# Altium PCB ControlBoard_v2.PcbDoc (part 2 of 2)
Units mm, origin at the board's own origin, x right, y up, seen from the top; angles counter-clockwise.
Board outline 155.45 x 113.03 mm, 2 copper layers (Top Layer, Bottom Layer); 127 components, 106 nets, 627 pads, 129 vias.
Unrouted connection lines stored in the file: 132.
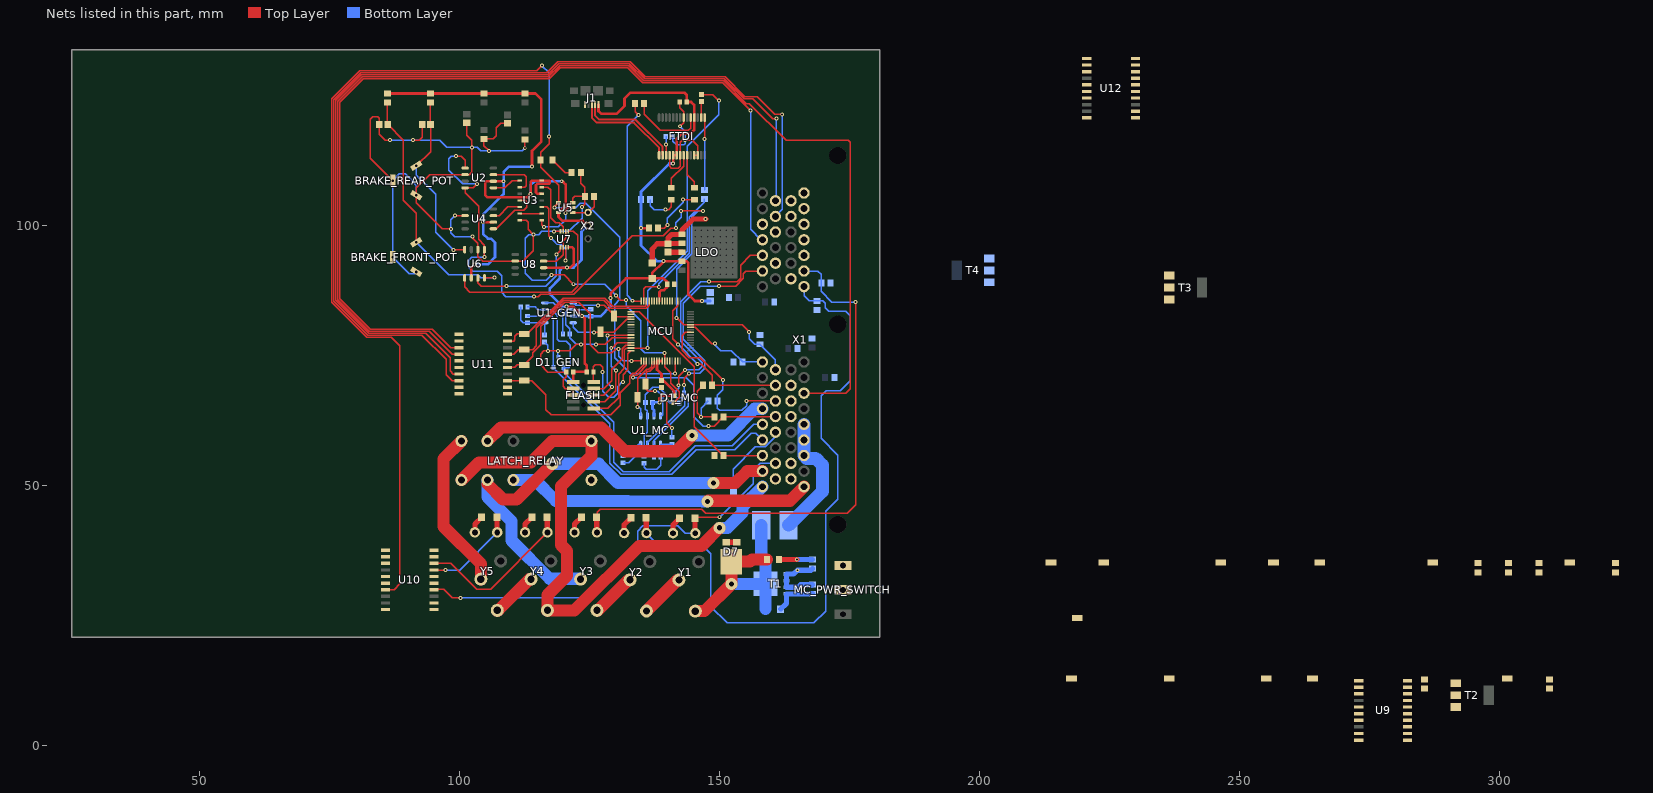
[diagram p2: the nets of this part, all layers, seen from the top]

## Via types
v1: diameter 0.762, hole 0.381, Top Layer to Bottom Layer, 123 vias
v2: diameter 2.34, hole 1, Top Layer to Bottom Layer, 6 vias

## Nets (pads, with @x,y where several pads share a name; then routed paths per layer and width w, separated by ;. In a path a pad name is that pad's centre, name@x,y a point inside that pad or via, vN(x,y) a via of type N, cw(c..) or ccw(c..) an arc to the next point about the centre after c; other vN are vias at no path point) (continued)
5V: C1_GEN.2 C1_MC.2 C4.2 C5.2 C6.2 C7.2 C8.2 C10.2 FLASH.1 FTDI.4 FTDI.19 FTDI.20 J1.1 LDO.4 LDO_D.1 MC_PWR_SWITCH.2 MCU.7 MCU.8 MCU.9 MCU.41 R4.2 R5.2 R6.2 R7.2 R25.2 R30.2 R35.2 R36.2 T3.2 T4.2 U1_GEN.3 U1_MC.3 U2.6 U3.12 U3.14 U4.6 U5.5 U6.6 U7.8 U8.6 U9.1 U9.10 U9.11 U9.12 U9.15 U9.16 U9.19 U9.20 X1.B18 X1.B19 X2.2 | length 308.2
  Top Layer w0.254: R4.2@104.521,125.335 R4.2@104.648,125.208 ; v1(119.634,108.458) v1@119.761,108.458 ; C6.2@138.811,70.317 C6.2@138.938,70.19 ; v1@139.192,92.944 v1(139.192,93.091) ; 141.734,116.6 141.746,116.6
  Top Layer w0.4: MCU.41@138.434,85.379 138.434,86.277
  Top Layer w0.513: R5.2@86.106,125.335 R6.2@94.361,125.335 R4.2@104.521,125.335 ; U6.6@102.235,89.858 102.235,91.831 v1(102.87,92.466) ; v1(104.521,100.584) U4.6@106.484,100.584 ; R4.2@104.648,125.335 R7.2@112.522,125.335 114.568,125.335 115.697,124.206 115.697,116.078 113.919,114.3 v1(113.919,111.252) ; v1(108.458,108.458) U2.6@106.484,108.458 105.156,108.458 104.902,108.204 104.902,105.791 105.283,105.41 113.099,105.41 v1(113.665,105.976) 113.665,108.331 113.919,108.585 U3.14@115.77,108.585 117.221,108.585 117.348,108.458 117.348,108.091 117.207,107.95 114.935,107.95 114.681,107.696 114.681,106.299 114.935,106.045 U3.12@115.77,106.045 ; U8.6@116.136,91.821 v1(120.65,91.821) 121.285,91.821 121.92,92.456 121.92,95.474 121.662,95.732 U7.8@121,95.732 ; v1@119.761,108.458 120.392,107.827 120.392,103.803 U5.5@119.017,102.428 119.017,101.582 119.761,100.838 123.637,100.838 X2.2@124.714,99.761 ; v1(120.523,84.328) 121.793,84.328 v1(123.571,82.55) 124.082,82.039 124.082,76.772 124.079,76.77 124.079,73.385 124.445,73.019 R30.2@124.445,71.795 ; C5.2@121.833,71.755 121.833,69.892 FLASH.1@121.875,69.85 ; C5.2@121.833,71.795 R30.2@124.445,71.795 ; R30.2@124.445,71.755 R30.2@124.445,71.795 ; J1.1@126.719,123.182 126.719,121.947 127.254,121.412 130.175,121.412 131.699,122.936 131.699,124.373 132.802,125.476 143.296,125.476 143.677,125.095 C10.2@143.677,123.698 144.526,123.698 145.114,123.11 FTDI.4@145.114,120.719 145.114,118.317 144.399,117.602 142.748,117.602 141.746,116.6 ; v1(129.032,85.979) 129.032,86.868 131.953,89.789 LDO_D.1@137.033,89.789 ; v1(134.874,99.441) 136.13,99.441 136.271,99.582 R35.2@136.412,99.441 ; v1(138.43,65.913) 138.43,66.686 138.967,67.223 C7.2@141.224,67.223 141.224,68.072 139.192,70.104 C6.2@139.065,70.104 ; 138.434,86.277 138.434,87.126 138.811,87.503 139.319,87.503 139.934,88.118 139.934,89.047 139.192,89.789 LDO_D.1@137.033,89.789 ; MCU.9@138.8,73.879 MCU.8@138.434,73.879 137.968,73.879 137.968,72.217 138.811,71.374 C6.2@138.811,70.317 ; v1@139.192,92.944 137.033,90.785 LDO_D.1@137.033,89.789 ; v1(139.192,93.091) 142.755,93.091 LDO.4@142.775,93.071 143.635,93.071 144,92.706 144,89.632 ; v1(141.058,111.887) FTDI.19@141.058,113.469 FTDI.20@141.734,113.469 141.734,116.6 ; 144,89.631 144,86.667 145.234,85.433 v1(146.596,85.433)
  Bottom Layer w0.254: U1_GEN.3@121.849,82.513 U1_GEN.3@121.889,82.473 ; X2.2@124.526,99.888 X2.2@125.222,99.888 ; U1_MC.3@137.368,63.304 U1_MC.3@137.442,63.378
  Bottom Layer w0.513: v1(102.87,92.466) 105.42,92.466 106.807,93.853 106.807,96.647 106.045,97.409 105.41,97.409 104.521,98.298 v1(104.521,100.584) 104.521,102.029 108.458,105.966 v1(108.458,108.458) 108.458,110.236 109.474,111.252 v1(113.919,111.252) ; v1(113.665,105.976) 113.665,107.696 114.427,108.458 v1(119.634,108.458) ; v1(120.523,84.328) 119.761,84.328 117.348,86.741 117.348,87.818 119.253,89.723 119.253,91.283 119.791,91.821 v1(120.65,91.821) 121.92,91.821 123.444,93.345 123.444,98.806 X2.2@124.526,99.888 ; U1_GEN.3@121.889,82.473 C1_GEN.2@125.22,82.473 127.05,82.473 129.032,84.455 v1(129.032,85.979) ; U1_MC.3@137.368,63.304 137.368,64.435 137.087,64.716 C1_MC.2@137.087,65.913 v1(138.43,65.913) ; v1(139.192,93.091) 137.922,93.091 134.874,96.139 v1(134.874,99.441) 134.888,99.455 R36.2@134.888,104.902 134.888,106.44 140.335,111.887 v1(141.058,111.887) ; v1(146.596,85.433) C4.2@148.187,85.433
6: MCU.27 R16.1 U2.1 U2.4 U6.1 X1.A17 | length 141.7
  Top Layer w0.254: v1(99.314,113.284) 100.272,113.284 101.034,112.522 U2.1@101.034,110.998 ; v1(103.378,107.95) 102.616,107.188 U2.4@101.034,107.188 101.034,106.23 103.632,103.632 103.632,97.282 104.775,96.139 U6.1@104.775,95.308 v1(104.775,93.853) ; v1(114.3,86.277) 115.106,86.277 115.57,86.741 121.92,86.741 133.162,97.983 139.119,97.983 140.591,99.455 v1(141.605,99.455) ; v1(141.734,82.169) 141.776,82.169 143.066,80.879 MCU.27@144.434,80.879 154.325,80.879 v1(155.702,79.502) ; v1(142.621,102.743) v1(146.826,102.743)
  Bottom Layer w0.254: v1(99.314,113.284) 98.425,113.284 97.917,112.776 97.917,110.617 100.584,107.95 v1(103.378,107.95) ; v1(104.775,93.853) 102.362,93.853 101.727,93.218 101.727,91.953 102.489,91.191 107.183,91.191 108.077,90.297 108.077,87.102 108.902,86.277 v1(114.3,86.277) ; v1(141.605,99.455) 141.605,100.469 142.621,101.485 v1(142.621,102.743) ; v1(141.734,82.169) 141.734,91.569 144.687,94.522 144.687,101.487 145.943,102.743 v1(146.826,102.743) ; v1(155.702,79.502) 155.702,78.18 156.779,77.103 R16.1@157.734,77.103 160.743,74.094 X1.A17@160.743,72.191
7: MCU.26 R23.1 X1.A9 | length 16.9
  Top Layer w0.254: MCU.26@144.434,80.379 145.3,80.379 148.463,77.216 v1(149.098,77.216)
  Bottom Layer w0.254: v1(149.098,77.216) 149.098,76.962 150.241,75.819 152.29,75.819 R23.1@154.418,73.691 X1.A9@158.243,73.691 X1.A9@158.243,73.899
8: MCU.34 R19.1 X1.A16 | length 32.3
  Top Layer w0.254: MCU.34@141.934,85.379 141.934,84.53 140.97,83.566 140.97,78.131 v1(142.012,77.089) ; v1(145.711,73.279) 146.431,73.279 148.576,71.134 R19.1@148.576,69.215 160.719,69.215 X1.A16@160.743,69.191
  Bottom Layer w0.254: v1(142.012,77.089) 145.711,73.39 v1(145.711,73.279)
9: MCU.24 R21.1 X1.A15 | length 33.4
  Top Layer w0.254: MCU.24@144.434,79.379 143.387,79.379 142.775,78.767 142.775,75.919 144.145,74.549 146.304,74.549 v1(150.622,70.231) ; v1(155.194,66.191) X1.A15@160.743,66.191
  Bottom Layer w0.254: v1(150.622,70.231) 150.622,68.326 149.592,67.296 R21.1@149.592,66.191 149.592,64.794 149.997,64.389 154.305,64.389 155.194,65.278 v1(155.194,66.191)
10: MCU.3 R24.1 X1.A14 | length 40.5
  Top Layer w0.254: v1(133.35,70.691) 133.104,70.691 133.578,71.165 134.081,71.165 134.543,71.628 135.934,73.019 MCU.3@135.934,73.879 ; v1(147.828,61.341) 148.957,61.341 R24.1@150.735,63.119 160.671,63.119 X1.A14@160.743,63.191
  Bottom Layer w0.254: v1(133.35,70.691) 143.558,70.691 145.034,69.215 145.034,63.119 146.812,61.341 v1(147.828,61.341)
12V_PWR: "PTC Fuse.1" X1.A28 X1.A29 X1.A30 X1.B22 | length 24.6
  Bottom Layer w2.5: 163.28,42.291 169.799,48.81 169.799,53.848 168.479,55.168 166.766,55.168 X1.A28@166.243,55.691 X1.A29@166.243,58.691 X1.A30@166.243,61.691
AGND: BRAKE_FRONT_POT.2 BRAKE_FRONT_POT.3 BRAKE_REAR_POT.2 BRAKE_REAR_POT.3 C7.1 C12.1 C13.1 C14.1 C15.1 MCU.10 R8.1 R9.1 R10.1 R11.1 R13.2 R14.1 R16.2 R17.1 R20.1 R22.1 R23.2 U2.2 U3.7 U4.2 U5.3 U6.2 U7.4 U8.2 X1.B23 X1.B24 | length 242
  Top Layer w0.254: v1(86.614,116.37) 85.687,116.37 84.544,117.513 C14.1@84.544,119.38 84.544,120.565 84.205,120.904 83.312,120.904 82.804,120.396 82.804,112.903 BRAKE_REAR_POT.2@87.122,108.585 ; v1(91.021,116.37) 92.202,116.37 92.799,116.967 C15.1@92.799,119.38 ; v1(98.298,99.314) 96.647,99.314 91.667,104.294 BRAKE_REAR_POT.3@91.667,105.745 91.667,107.161 94.234,109.728 U2.2@101.034,109.728 101.854,109.728 102.362,110.236 v1(102.362,114.966) 102.362,116.332 101.346,117.348 C13.1@101.346,119.723 ; v1(99.06,101.854) U4.2@101.034,101.854 ; v1(102.489,97.79) 102.489,97.536 103.505,96.52 U6.2@103.505,95.308 103.505,93.98 104.394,93.091 U8.2@110.686,93.091 112.141,93.091 114.173,95.123 v1(114.173,98.171) 113.157,99.187 113.157,100.584 112.776,100.965 U3.7@111.56,100.965 ; v1(105.664,114.3) 104.648,115.316 R9.1@104.648,116.6 106.426,116.6 107.061,117.235 107.061,118.773 107.884,119.596 C12.1@109.22,119.596 ; v1(112.522,114.808) R8.1@112.522,116.473 ; v1(117.679,90.424) 120.116,90.424 121.875,88.665 v1(121.875,88.646) ; v1(118.11,98.806) 119.366,98.806 U7.4@119.392,98.832 ; U5.3@121.767,104.328 121.767,105.156 122.148,105.537 R11.1@124.093,105.537 ; R10.1@123.303,110.109 123.303,108.091 124.093,107.301 R11.1@124.093,105.537 ; v1(123.571,103.505) 124.093,104.027 R11.1@124.093,105.537 ; v1(130.048,86.487) 130.937,85.598 v1(132.005,85.598) ; v1(139.446,75.438) 139.446,73.891 MCU.10@139.434,73.879 139.434,72.775 140.589,71.62 140.589,69.638 142.24,67.987 142.24,66.889 C7.1@141.224,65.873
  Bottom Layer w0.254: v1(86.614,116.37) v1(91.021,116.37) 96.132,116.37 97.536,114.966 v1(102.362,114.966) 103.347,114.966 104.013,114.3 v1(105.664,114.3) 112.014,114.3 v1(112.522,114.808) ; BRAKE_FRONT_POT.3@91.667,91.013 91.332,90.678 90.297,90.678 BRAKE_FRONT_POT.2@87.122,93.853 BRAKE_REAR_POT.2@87.122,108.585 88.392,109.855 89.535,109.855 91.667,107.723 BRAKE_REAR_POT.3@91.667,105.745 ; v1(99.06,101.854) 98.298,101.092 v1(98.298,99.314) 98.298,98.552 99.06,97.79 v1(102.489,97.79) ; v1(117.679,90.424) 116.663,89.408 113.98,89.408 112.588,90.8 112.588,97.475 113.284,98.171 v1(114.173,98.171) 115.189,98.171 115.824,98.806 v1(118.11,98.806) 121.031,98.806 123.571,101.346 v1(123.571,103.505) ; v1(121.875,88.646) 127.889,88.646 v1(130.048,86.487) ; v1(132.005,85.598) 132.005,84.53 134.874,81.661 134.874,76.2 135.636,75.438 v1(139.446,75.438)
AIR+_5V: MCU.39 TEST12.1 U12.5
AIR+_12V: U12.17 X1.B14
AIR-_5V: MCU.42 TEST13.1 U12.7
AIR-_12V: U12.14 X1.B11
ALL_GOOD: U3.8 U5.2 | length 9.7
  Top Layer w0.254: U3.8@115.77,100.965 115.77,100.13 v1(116.205,99.695) ; v1(120.396,102.362) 120.396,102.997 120.777,103.378 U5.2@121.767,103.378
  Bottom Layer w0.254: v1(116.205,99.695) 118.999,99.695 120.396,101.092 v1(120.396,102.362)
BF_ADJUST_OK: U6.7 U7.5 | length 22.9
  Top Layer w0.254: U6.7@103.505,89.858 103.505,88.9 104.14,88.265 v1(108.966,88.265) ; v1(118.618,94.361) 119.392,95.135 U7.5@119.392,95.732
  Bottom Layer w0.254: v1(108.966,88.265) 116.586,88.265 118.618,90.297 v1(118.618,94.361)
BMS_OK: D2.2 R15.1 TEST5.1 U9.5 X1.B20 Y2.COIL1 | length 127.2
  Top Layer w1: D2.2@135.884,43.688 135.884,40.83 Y2.COIL1@135.933,40.781
  Bottom Layer w0.254: Y2.COIL1@135.933,40.781 138.43,38.284 146.882,38.284 148.336,36.83 148.336,26.586 151.427,23.495 168.148,23.495 170.434,25.781 170.434,44.958 172.743,47.267 172.743,55.776 169.545,58.974 169.545,67.183 170.561,68.199 173.252,68.199 175.133,70.08 175.133,82.55 174.244,83.439 170.995,83.439 170.307,84.127 170.307,84.963 169.813,85.457 R15.1@168.783,85.457 167.259,85.457 166.243,86.473 X1.B20@166.243,88.191
BMS_OK_5V: MCU.12 U9.17
BR_ADJUST_OK: U6.5 U7.1 | length 36.2
  Top Layer w0.254: U6.5@100.965,89.858 100.965,88.138 101.981,87.122 109.102,87.122 109.106,87.126 118.224,87.126 118.228,87.122 121.539,87.122 122.682,88.265 122.682,98.044 121.894,98.832 U7.1@120.892,98.832
BRAKE_FRONT_POT: BRAKE_FRONT_POT.1 C14.2 R5.1 U6.8 | length 48.9
  Top Layer w0.254: R5.1@86.106,123.585 86.106,119.418 C14.2@86.144,119.38 89.154,116.37 89.154,104.775 91.667,102.262 BRAKE_FRONT_POT.1@91.667,96.693 ; U6.8@104.775,89.858 104.833,89.916 v1(106.68,89.916)
  Bottom Layer w0.254: BRAKE_FRONT_POT.1@91.667,96.693 97.936,90.424 103.505,90.424 104.013,89.916 v1(106.68,89.916)
BRAKE_LIGHT_5V: MCU.43 TEST11.1 U12.3
BRAKE_LIGHT_12V: U12.18 X1.A18
BRAKE_REAR_POT: BRAKE_REAR_POT.1 C15.2 R6.1 U6.4 | length 34.6
  Top Layer w0.254: BRAKE_REAR_POT.1@91.667,111.425 94.399,114.157 C15.2@94.399,119.38 94.361,119.418 R6.1@94.361,123.585 ; v1(98.806,95.25) 100.907,95.25 U6.4@100.965,95.308
  Bottom Layer w0.254: BRAKE_REAR_POT.1@91.667,111.425 91.667,109.628 95.377,105.918 95.377,98.679 v1(98.806,95.25)
BRK_RANGE_OK: U3.6 U3.9 | length 4.2
  Top Layer w0.254: U3.6@111.56,102.235 U3.9@115.77,102.235
BSPD_OK_5V: BSPD_OK.1 MCU.14 TEST10.1 U5.4 U10.7 | length 232.7
  Top Layer w0.254: U10.7@85.749,29.876 87.407,29.876 88.519,30.988 88.519,34.317 88.519,76.835 86.868,78.486 82.173,78.486 75.438,85.221 75.438,124.329 80.776,129.667 114.808,129.667 v1(115.824,130.683) ; v1(117.221,117.094) 117.221,115.697 115.563,114.039 BSPD_OK.1@115.563,112.522 115.563,111.132 119.017,107.678 U5.4@119.017,104.328 118.237,103.548 v1(118.237,103.378) ; v1(141.434,71.457) MCU.14@141.434,73.879
  Bottom Layer w0.254: v1(115.824,130.683) 117.221,129.286 v1(117.221,117.094) ; v1(118.237,103.378) 122.301,103.378 123.19,104.267 124.272,104.267 130.81,97.729 130.81,85.76 129.794,84.744 129.794,74.549 132.969,71.374 133.052,71.457 v1(141.434,71.457)
BSPD_OK_12V: D1.2 U10.14 X1.A11 Y1.COIL1 | length 83.7
  Top Layer w0.254: U10.14@95.099,29.972 96.901,29.972 98.552,28.321 v1(100.203,28.321) ; D1.2@145.282,43.663 145.444,43.825 v1(149.997,43.825)
  Top Layer w1: D1.2@145.282,43.663 145.282,40.805 Y1.COIL1@145.331,40.756
  Bottom Layer w0.254: v1(100.203,28.321) 125.222,28.321 134.239,37.338 134.239,41.148 135.255,42.164 141.986,42.164 143.394,40.756 Y1.COIL1@145.331,40.756 ; v1(149.997,43.825) 156.464,50.292 156.464,52.832 157.823,54.191 X1.A11@160.743,54.191
CAN_H_GEN: D1_GEN.1 R3_GEN.2 U1_GEN.7 X1.A5 | length 74.8
  Bottom Layer w0.254: R3_GEN.2@113.043,84.291 114.504,84.291 115.012,83.783 U1_GEN.7@116.399,83.783 117.679,83.783 118.743,82.719 118.743,78.092 119.196,77.639 120.521,77.639 121.283,76.877 121.283,72.94 120.966,72.623 D1_GEN.1@119.947,72.623 119.947,71.821 129.667,62.101 129.667,54.356 131.445,52.578 140.335,52.578 145.288,57.531 152.433,57.531 156.593,61.691 X1.A5@158.243,61.691
CAN_H_MC: D1_MC.1 R3_MC.2 U1_MC.7 X1.B3 | length 60.9
  Top Layer w0.254: v1(142.113,69.215) 142.113,70.921 v1(143.383,72.191) ; v1(147.955,89.154) 153.416,89.154 154.051,89.789 154.051,92.329 155.913,94.191 X1.B3@158.243,94.191
  Bottom Layer w0.254: R3_MC.2@135.497,55.514 136.098,56.115 U1_MC.7@136.098,57.854 136.098,58.12 143.256,65.278 143.256,66.421 142.875,66.802 141.732,66.802 141.278,67.256 D1_MC.1@141.278,67.802 142.113,68.637 v1(142.113,69.215) ; v1(143.383,72.191) 146.012,72.191 146.701,72.88 146.701,73.517 142.494,77.724 142.494,85.244 146.404,89.154 v1(147.955,89.154)
CAN_L_GEN: D1_GEN.2 R2_GEN.1 U1_GEN.6 X1.A4 | length 71.6
  Bottom Layer w0.254: R2_GEN.1@113.028,82.528 113.043,82.513 U1_GEN.6@116.399,82.513 117.679,82.513 118.047,82.145 D1_GEN.2@118.047,72.623 128.905,61.765 128.905,54.229 131.064,52.07 140.843,52.07 145.542,56.769 152.876,56.769 156.051,59.944 156.99,59.944 X1.A4@158.243,58.691
CAN_L_MC: D1_MC.2 R2_MC.1 U1_MC.6 X1.B2 | length 55.7
  Top Layer w0.254: v1(143.178,69.293) 143.178,70.534 v1(144.145,71.501) ; v1(149.86,88.265) 153.066,88.265 154.559,89.758 154.559,90.678 155.072,91.191 X1.B2@158.243,91.191
  Bottom Layer w0.254: R2_MC.1@137.387,55.372 137.387,57.835 U1_MC.6@137.368,57.854 137.368,58.501 144.018,65.151 144.018,66.962 D1_MC.2@143.178,67.802 v1(143.178,69.293) ; v1(144.145,71.501) 146.206,71.501 147.193,72.488 147.193,73.899 143.002,78.09 143.002,84.963 146.304,88.265 v1(149.86,88.265)
D_N: FTDI.16 J1.2 | length 19.2
  Top Layer w0.381: J1.2@126.069,123.182 126.069,121.073 126.784,120.358 133.769,120.358 133.985,120.142 139.03,115.097 FTDI.16@139.03,113.469
D_P: FTDI.15 J1.3 | length 19.2
  Top Layer w0.381: J1.3@125.419,123.182 125.419,120.707 126.403,119.723 133.506,119.723 138.362,114.867 138.362,114.492 138.354,114.484 FTDI.15@138.354,113.469
DCDC_DISABLE_5V: MCU.46 TEST17.1 U11.9 | length 32
  Top Layer w0.254: U11.9@109.196,77.719 110.363,77.719 110.617,77.973 110.617,78.608 111.125,79.116 TEST17.1@112.399,79.116 113.032,79.116 119.895,85.979 127.889,85.979 129.418,84.45 135.689,84.45 135.934,84.695 MCU.46@135.934,85.379
DCDC_DISABLE_12V: U11.13 X1.B4 | length 175.7
  Top Layer w0.254: U11.13@99.846,76.449 98.303,76.449 94.742,80.01 82.804,80.01 76.962,85.852 76.962,123.698 81.407,128.143 117.221,128.143 119.38,130.302 132.334,130.302 135.255,127.381 150.622,127.381 v1(155.956,122.047)
  Bottom Layer w0.254: v1(155.956,122.047) 155.956,99.187 157.952,97.191 X1.B4@158.243,97.191
DGND: C1_GEN.1 C1_MC.1 C2_GEN.1 C2_MC.1 C3.1 C4.1 C5.1 C6.1 C8.1 C10.1 C11.1 D1.1 D1_GEN.3 D1_MC.3 D2.1 D3.1 D4.1 D5.1 D7.1 D7.2 FLASH.3 FLASH.5 FTDI.7 FTDI.18 FTDI.21 FTDI.25 FTDI.26 J1.5 LATCH_RELAY.1 LDO.3 MCU.40 MCU.59 R1_GEN.1 R1_MC.1 R12.2 R15.2 R18.2 R19.2 R21.2 R24.2 R26.1 R27.1 R28.1 R29.1 R31.1 R32.1 R37.1 R38.1 T1.1 T1.2 T1.3 T2.3 U1_GEN.2 U1_MC.2 U9.2 U9.6 U10.2 U10.6 U11.2 U11.6 U12.2 U12.6 X1.A22 X1.A23 X1.A24 X1.B25 X1.B26 Y1.COIL2 Y2.COIL2 Y3.COIL2 Y4.COIL2 Y5.COIL2 | length 157.6
  Top Layer w0.254: FLASH.5@121.875,67.31 FLASH.3@121.875,68.58 120.356,68.58 119.892,69.044 119.892,70.235 120.483,70.826 C5.1@120.483,71.755 116.967,71.755 115.563,73.159 115.563,75.177 116.205,75.819 v1(116.967,75.819) v1(118.872,75.819) 121.158,75.819 122.428,77.089 v1(123.317,77.089) ; v1(126.238,77.089) 128.016,77.089 129.306,78.379 MCU.59@132.934,78.379 ; v1(139.827,66.421) 139.827,61.964 v1(140.831,60.96) ; FTDI.18@140.382,113.469 140.382,111.339 140.723,110.998 142.069,110.998 142.41,111.339 FTDI.21@142.41,113.469 142.41,115.927 142.853,116.37 v1(143.383,116.37) 144.695,116.37 145.79,115.275 FTDI.26@145.79,113.469 FTDI.25@145.114,113.469 ; C10.1@142.327,123.698 142.327,122.622 143.086,121.863 FTDI.7@143.086,120.719 143.086,119.756 v1(142.367,119.037) ; R19.2@146.826,69.215 145.669,68.058 145.669,63.881 v1(146.431,63.119) R24.2@148.985,63.119
  Top Layer w1: Y5.COIL2@102.931,40.908 102.931,42.514 D5.1@104.232,43.815 ; Y4.COIL2@112.583,40.908 112.583,42.514 D4.1@113.884,43.815 ; Y3.COIL2@122.108,40.908 122.108,42.514 D3.1@123.409,43.815 ; Y2.COIL2@131.633,40.781 131.633,42.387 D2.1@132.934,43.688 ; C3.1@140.081,94.831 140.121,94.791 LDO.3@142.775,94.791 ; Y1.COIL2@141.031,40.756 141.031,42.362 D1.1@142.332,43.663 ; D7.2@151.257,39.013 D7.1@153.289,39.013
  Bottom Layer w0.254: C2_GEN.1@116.33,77.52 116.967,76.883 v1(116.967,75.819) ; v1(118.872,75.819) 118.872,74.748 D1_GEN.3@118.997,74.623 ; C1_GEN.1@125.22,83.823 125.18,83.783 U1_GEN.2@121.849,83.783 121.759,83.693 120.733,83.693 120.394,83.354 120.394,80.814 121.171,80.037 R1_GEN.1@121.171,79.036 121.171,78.346 122.428,77.089 v1(123.317,77.089) v1(126.238,77.089) ; R1_MC.1@131.545,54.342 132.574,54.342 135.497,57.265 135.497,59.553 136.098,60.154 U1_MC.2@136.098,63.304 136.098,64.262 135.737,64.623 C1_MC.1@135.737,65.913 135.737,67.423 137.148,68.834 138.306,68.834 139.827,67.313 v1(139.827,66.421) 140.446,65.802 D1_MC.3@142.228,65.802 ; C2_MC.1@140.831,59.222 v1(140.831,60.96) ; C11.1@141.01,117.094 141.01,116.165 141.732,115.443 143.129,115.443 143.383,115.697 v1(143.383,116.37) 143.383,117.983 142.367,118.999 v1(142.367,119.037) ; v1(146.431,63.119) 146.431,64.78 R21.2@147.842,66.191
  Bottom Layer w1: R32.1@167.88,33.923 167.582,33.625 v1(164.973,33.625) 164.241,32.893 T1.1@162.847,32.893 T1.2@162.847,31.623 T1.3@162.847,30.353 165.1,30.353 165.594,30.847 R31.1@167.894,30.847
DISCHARGE_5V: MCU.1 TEST15.1 U11.5 | length 43.1
  Top Layer w0.254: U11.5@109.196,72.639 110.617,72.639 111.125,73.147 TEST15.1@112.395,73.147 114.046,74.798 114.046,75.438 115.57,76.962 115.57,80.576 120.211,85.217 122.87,85.217 125.095,82.992 125.095,77.042 126.699,75.438 129.286,75.438 130.079,76.231 v1(130.556,76.231) ; v1(133.096,73.899) 134.914,73.899 MCU.1@134.934,73.879
  Bottom Layer w0.254: v1(130.556,76.231) 130.556,74.803 131.46,73.899 v1(133.096,73.899)
DISCHARGE_12V: U11.17 X1.B13 | length 177.4
  Top Layer w0.254: U11.17@99.846,71.369 98.806,71.369 98.171,72.004 98.171,74.549 93.472,79.248 82.488,79.248 76.2,85.536 76.2,124.014 81.091,128.905 116.905,128.905 119.064,131.064 132.65,131.064 135.571,128.143 150.938,128.143 154.708,124.373 156.424,124.373 160.274,120.523 v1(160.909,120.523)
  Bottom Layer w0.254: X1.B13@160.743,104.691 160.909,104.857 v1(160.909,120.523)
FAN_EN_5V: MCU.44 R26.2 T3.1 TEST3.1
FAN_EN_12V: R27.2 T3.3 X1.A19
FAN_PWM_5V: MCU.36 R28.2 T2.1 TEST1.1
FAN_PWM_12V: R25.1 T2.2 X1.A10
FTDI_GREEN: FTDI.23 GRN.2 | length 6.9
  Top Layer w0.254: FTDI.23@143.762,113.469 143.762,109.73 145.161,108.331 GRN.2@145.161,107.195
FTDI_RED: FTDI.22 RED.2 | length 7.3
  Top Layer w0.254: RED.2@140.716,107.195 140.716,109.012 143.086,111.382 FTDI.22@143.086,113.469
FTDI_UART_RX: MCU.48 R34.2 | length 41.3
  Top Layer w0.254: v1(133.223,85.471) 133.315,85.379 MCU.48@134.934,85.379 ; R34.2@133.745,123.444 133.745,121.817 v1(134.366,121.196)
  Bottom Layer w0.254: v1(133.223,85.471) 132.207,86.487 132.207,119.037 v1(134.366,121.196)
FTDI_UART_TX: MCU.47 R33.2 | length 26
  Top Layer w0.254: MCU.47@135.434,85.379 135.434,87.821 135.751,88.138 v1(138.299,88.138)
  Bottom Layer w0.254: v1(138.299,88.138) 138.299,88.773 144.146,94.62 144.146,101.542 147.066,104.462 R33.2@147.066,105.043
GLV: "PTC Fuse.2" C3.2 D6.2 D7.3 LDO.1 LDO.2 LDO_D.2 RVP_LED.1 T1.mb U10.1 U10.10 U10.11 U10.12 U10.15 U10.16 U10.19 U10.20 U11.1 U11.10 U11.11 U11.12 U11.15 U11.16 U11.19 U11.20 U12.1 U12.10 U12.11 U12.12 U12.15 U12.16 U12.19 U12.20 Y1.COM | length 62.7
  Top Layer w1: LDO_D.2@137.033,92.739 137.033,95.44 138.024,96.431 C3.2@140.081,96.431 ; LDO.2@142.775,96.511 140.161,96.511 C3.2@140.081,96.431 ; v1(147.32,101.219) 144.941,101.219 142.775,99.053 LDO.1@142.775,98.231 140.776,98.231 140.081,97.536 C3.2@140.081,96.431
  Top Layer w2.34: Y1.COM@145.331,25.756 147.041,25.756 v2(152.273,30.988) D7.3@152.273,35.306 155.829,35.306 156.21,35.687 RVP_LED.1@159.131,35.687
  Bottom Layer w1: D6.2@158.799,26.162 D6.2@158.847,26.21
  Bottom Layer w2.34: v2(152.273,30.988) T1.mb@158.847,30.988 ; 158.03,42.291 158.03,36.153 158.847,35.336 T1.mb@158.847,30.988 ; D6.2@158.847,26.21 T1.mb@158.847,30.988
IMD_OK: D3.2 R12.1 TEST2.1 U9.3 X1.B21 Y3.COIL1 | length 108.2
  Top Layer w0.254: D3.2@126.359,43.815 126.492,43.948 126.492,44.831 127,45.339 146.558,45.339 147.32,44.577 174.541,44.577 176.149,46.185 v1(176.149,85.217)
  Top Layer w1: D3.2@126.359,43.815 126.359,40.957 Y3.COIL1@126.408,40.908
  Bottom Layer w0.254: X1.B21@166.243,91.191 168.91,91.191 169.559,90.542 R12.1@169.559,88.9 169.559,87.249 171.591,85.217 v1(176.149,85.217)
IMD_OK_5V: MCU.11 U9.18
JTAG_TCLK: FLASH.4 MCU.62 | length 13
  Top Layer w0.254: FLASH.4@125.775,68.58 127.762,68.58 129.286,70.104 129.286,72.27 131.318,74.302 131.318,76.231 131.966,76.879 MCU.62@132.934,76.879
JTAG_TDI: FLASH.8 MCU.61 | length 17.9
  Top Layer w0.254: FLASH.8@125.775,66.04 127.889,66.04 130.048,68.199 v1(130.048,72.009) ; v1(129.159,76.379) 129.338,76.379 130.338,77.379 MCU.61@132.934,77.379
  Bottom Layer w0.254: v1(129.159,76.379) 129.159,72.898 v1(130.048,72.009)
JTAG_TDO: FLASH.6 MCU.58 | length 20.1
  Top Layer w0.254: FLASH.6@124.714,67.31 FLASH.6@125.775,67.31 127.762,67.31 v1(129.286,68.834) ; v1(128.397,78.767) 128.509,78.879 MCU.58@132.934,78.879
  Bottom Layer w0.254: v1(128.397,78.767) 128.397,69.723 v1(129.286,68.834)
JTAG_TMS: FLASH.2 MCU.64 R30.1 | length 22.7
  Top Layer w0.254: FLASH.2@125.775,69.85 125.745,69.88 R30.1@125.745,71.755 125.745,72.786 126.111,73.152 127.031,73.152 127.508,72.675 v1(127.508,71.755) ; v1(131.433,69.85) 131.433,71.275 132.334,72.176 132.334,75.279 MCU.64@132.934,75.879
  Bottom Layer w0.254: v1(127.508,71.755) 127.508,68.072 128.651,66.929 129.667,66.929 130.429,67.691 130.429,68.961 131.318,69.85 v1(131.433,69.85)
LATCH_BTN_IN: LATCH_RELAY.4 LATCH_RELAY.8 X1.A1 Y4.COM | length 117
  Top Layer w2.34: LATCH_RELAY.4@100.33,50.987 103.699,54.356 113.665,54.356 117.796,58.487 LATCH_RELAY.8@125.33,58.487 125.33,55.607 119.507,49.784 119.507,38.464 120.65,37.321 120.65,32.639 116.883,28.872 Y4.COM@116.883,25.908 ; Y4.COM@116.84,25.908 Y4.COM@116.883,25.908 ; v2@149.987,41.783 146.504,38.3 134.556,38.3 122.047,25.908 Y4.COM@116.883,25.908
  Bottom Layer w2.34: v2(149.997,41.783) 151.511,41.783 154.418,44.69 154.418,45.866 X1.A1@158.243,49.691
LATCH_BTN_OUT: LATCH_RELAY.3 X1.A2 Y3.NO | length 90.1
  Top Layer w1: LATCH_RELAY.3@105.33,50.245 LATCH_RELAY.3@105.33,50.987
  Top Layer w2.34: LATCH_RELAY.3@105.33,50.245 108.331,47.244 110.938,47.244 v2(117.796,54.102) ; v2(148.844,50.419) 153.035,50.419 155.307,52.691 X1.A2@158.243,52.691
  Bottom Layer w1: Y3.NO@123.162,32.004 Y3.NO@123.258,31.908
  Bottom Layer w2.34: LATCH_RELAY.3@105.33,50.987 105.33,47.705 109.982,43.053 109.982,39.357 117.335,32.004 117.54,32.004 Y3.NO@123.162,32.004 ; v2(117.796,54.102) 126.746,54.102 130.429,50.419 v2(148.844,50.419)
LATCH_LED: LATCH_RELAY.2 X1.A26 | length 58.7
  Top Layer w2.34: v2(147.701,46.863) 147.828,46.99 163.542,46.99 X1.A26@166.243,49.691
  Bottom Layer w2.34: LATCH_RELAY.2@110.33,50.987 114.492,50.987 118.488,46.99 146.771,46.863 v2(147.701,46.863)
MC_EN: MCU.49 R18.1 X1.A3 | length 43.5
  Top Layer w0.257: MCU.49@132.934,83.379 134.553,83.379 145.161,72.771 145.161,61.265 R18.1@150.735,55.691 X1.A3@158.243,55.691
MC_PWR_EN: MC_PWR_SWITCH.1 R29.2 X1.A13 | length 14.2
  Bottom Layer w0.254: R29.2@152.654,50.419 152.654,53.086 156.905,57.337 158.804,57.337 160.743,59.276 X1.A13@160.743,60.191
MCU_REDUN_1_5V: MCU.38 TEST8.1 U10.3
MCU_REDUN_1_12V: D4.2 U10.18 Y4.COIL1 | length 31.3
  Top Layer w0.254: U10.18@95.099,34.956 98.267,34.956 103.251,29.972 105.947,29.972 Y4.COIL1@116.883,40.908
  Top Layer w1: D4.2@116.834,43.815 116.834,40.957 Y4.COIL1@116.883,40.908
MCU_REDUN_2_5V: MCU.37 TEST9.1 U10.5
MCU_REDUN_2_12V: D5.2 U10.17 Y5.COIL1 | length 18.1
  Top Layer w0.254: U10.17@95.099,33.686 95.13,33.655 v1(97.282,33.655)
  Top Layer w1: D5.2@107.182,43.815 107.182,40.957 Y5.COIL1@107.231,40.908
  Bottom Layer w0.254: v1(97.282,33.655) 99.978,33.655 Y5.COIL1@107.231,40.908
NAND1: U3.10 U7.7 | length 15.7
  Top Layer w0.254: U3.10@115.77,103.505 116.713,103.505 117.094,103.124 117.094,97.983 117.545,97.532 v1(117.602,97.532) ; U7.7@120.392,95.732 120.396,95.728 v1(120.396,93.218)
  Bottom Layer w0.254: v1(117.602,97.532) 117.602,97.475 118.745,96.332 119.446,96.332 120.396,95.382 v1(120.396,93.218)
NAND2: U3.13 U7.3 | length 11.3
  Top Layer w0.254: U3.13@115.77,107.315 116.967,107.315 117.475,106.807 117.475,101.473 118.491,100.457 119.18,100.457 119.892,99.744 U7.3@119.892,98.832
NetBSPD_OK_2: BSPD_OK.2 R10.2 | length 4.7
  Top Layer w0.254: BSPD_OK.2@117.863,112.522 120.276,110.109 R10.2@121.553,110.109
NetC2_GEN_2: C2_GEN.2 R2_GEN.2 R3_GEN.1 U1_GEN.5 | length 9.9
  Bottom Layer w0.254: R3_GEN.1@111.743,84.291 111.743,81.678 112.193,81.228 R2_GEN.2@113.028,81.228 113.043,81.243 U1_GEN.5@116.399,81.243 116.399,78.939 C2_GEN.2@116.33,78.87
NetC2_MC_2: C2_MC.2 R2_MC.2 R3_MC.1 U1_MC.5 | length 10.7
  Bottom Layer w0.254: R3_MC.1@135.497,54.214 135.497,53.467 135.878,53.086 137.925,53.086 138.638,53.799 U1_MC.5@138.638,57.854 138.656,57.872 C2_MC.2@140.958,57.872
NetC9_1: C9.1 FTDI.2 | length 3.1
  Top Layer w0.254: FTDI.2@146.466,120.719 146.5,120.753 C9.1@146.5,123.785
NetD6_1: D6.1 R31.2 T1.4 | length 8.4
  Bottom Layer w1: D6.1@161.749,26.162 162.847,27.26 T1.4@162.847,29.083 167.88,29.083 R31.2@167.894,29.097
NetFTDI_1: FTDI.1 R33.1 | length 14
  Top Layer w0.254: v1(147.142,116.586) FTDI.1@147.142,120.719
  Bottom Layer w0.254: R33.1@147.066,106.793 147.142,106.869 v1(147.142,116.586)
NetFTDI_5: FTDI.5 R34.1 | length 14.6
  Top Layer w0.254: R34.1@135.495,123.444 135.495,121.299 138.557,118.237 144.019,118.237 144.438,118.656 FTDI.5@144.438,120.719
NetGRN_1: GRN.1 R35.1 | length 10.3
  Top Layer w0.254: R35.1@138.162,99.441 139.319,99.441 v1(139.954,100.076) ; v1(143.002,104.902) 145.154,104.902 GRN.1@145.161,104.895
  Bottom Layer w0.254: v1(139.954,100.076) 139.954,101.346 143.002,104.394 v1(143.002,104.902)
NetLATCH_RELAY_5: LATCH_RELAY.5 Y5.NO | length 31
  Top Layer w2.34: LATCH_RELAY.5@100.33,58.487 96.901,55.058 96.901,42.037 104.081,34.857 Y5.NO@104.081,31.908
NetMCU_5: MCU.5 TEST20.1 U1_MC.1 | length 12.9
  Top Layer w0.254: v1(134.239,65.024) 134.239,66.524 133.834,66.929 TEST20.1@134.227,66.929 134.227,70.516 135.974,72.263 136.398,72.263 136.934,72.799 MCU.5@136.934,73.879
  Bottom Layer w0.254: v1(134.239,65.024) 134.481,65.024 134.828,64.677 U1_MC.1@134.828,63.304
NetMCU_6: MCU.6 TEST21.1 U1_MC.4 | length 14.2
  Top Layer w0.254: MCU.6@137.434,73.879 137.434,72.76 136.556,71.882 136.132,71.882 135.884,71.634 135.884,68.454 136.266,68.072 v1(137.541,68.072)
  Bottom Layer w0.254: v1(137.541,68.072) 138.148,68.072 139.1,67.12 139.1,63.535 138.869,63.304 U1_MC.4@138.638,63.304
NetMCU_51: MCU.51 TEST18.1 U1_GEN.1 | length 12.4
  Top Layer w0.254: v1(126.643,84.582) 127.804,84.582 130.007,82.379 MCU.51@132.934,82.379
  Bottom Layer w0.254: U1_GEN.1@121.849,85.053 122.32,84.582 v1(126.643,84.582) v1@126.862,84.582
NetMCU_52: MCU.52 TEST19.1 U1_GEN.4 | length 13.5
  Top Layer w0.254: v1(125.857,79.375) 125.884,79.402 128.66,79.402 128.687,79.375 129.667,79.375 132.171,81.879 MCU.52@132.934,81.879
  Bottom Layer w0.254: U1_GEN.4@121.849,81.243 121.849,80.335 122.809,79.375 v1(125.857,79.375)
NetR1_GEN_2: R1_GEN.2 U1_GEN.8 | length 8.4
  Bottom Layer w0.254: U1_GEN.8@116.399,85.053 118.02,85.053 119.871,83.202 R1_GEN.2@119.871,79.036
NetR1_MC_2: R1_MC.2 U1_MC.8 | length 4.3
  Bottom Layer w0.254: R1_MC.2@131.433,55.641 132.21,55.641 134.423,57.854 U1_MC.8@134.828,57.854
NetR11_2: R11.2 U5.1 X2.3 | length 6.5
  Top Layer w0.254: U5.1@121.767,102.428 124.673,102.428 X2.3@124.714,102.469 125.843,103.598 R11.2@125.843,105.537
NetR32_2: R32.2 RVP_LED.2 | length 6.5
  Top Layer w1: RVP_LED.2@161.431,35.687 161.445,35.673 v1(164.846,35.673)
  Bottom Layer w1: v1(164.846,35.673) R32.2@167.88,35.673 R32.2@167.866,35.687
NetR36_1: R36.1 RED.1 | length 7.1
  Top Layer w0.254: v1(139.573,102.997) 140.207,102.997 140.716,103.506 RED.1@140.716,104.895
  Bottom Layer w0.254: R36.1@136.638,104.902 136.638,103.773 137.414,102.997 v1(139.573,102.997)
NetU2_5: U2.5 U3.1 | length 5.7
  Top Layer w0.254: U2.5@106.484,107.188 108.712,107.188 110.109,108.585 U3.1@111.56,108.585
NetU2_7: U2.7 U3.2 | length 9.5
  Top Layer w0.254: U2.7@106.484,109.728 112.395,109.728 112.776,109.347 112.776,107.569 112.522,107.315 U3.2@111.56,107.315
NetU3_4: U3.4 U4.5 | length 10.6
  Top Layer w0.254: U4.5@106.484,99.314 107.061,99.314 110.617,102.87 112.34,102.87 112.903,103.433 112.903,104.466 112.594,104.775 U3.4@111.56,104.775
NetU3_5: U3.5 U4.7 | length 5.8
  Top Layer w0.254: U4.7@106.484,101.854 107.569,101.854 109.22,103.505 U3.5@111.56,103.505
NetU7_2: U7.2 U7.6 U8.7 | length 9
  Top Layer w0.254: U8.7@116.136,93.091 118.618,93.091 119.892,94.365 U7.6@119.892,95.732 119.892,97.032 120.392,97.532 U7.2@120.392,98.832
NetY1_NO: Y1.NO Y2.COM | length 8.7
  Top Layer w1: Y1.NO@141.908,31.756 Y1.NO@142.181,31.756
  Top Layer w2.34: Y2.COM@135.933,25.781 Y1.NO@141.908,31.756
NetY2_NO: Y2.NO Y3.COM | length 8.8
  Top Layer w1: Y3.COM@126.408,25.908 Y3.COM@126.619,25.908 ; Y2.NO@132.492,31.781 Y2.NO@132.783,31.781
  Top Layer w2.34: Y3.COM@126.619,25.908 Y2.NO@132.492,31.781
NetY4_NO: Y4.NO Y5.COM | length 9
  Top Layer w1: Y4.NO@113.442,31.908 Y4.NO@113.733,31.908
  Top Layer w2.34: Y5.COM@107.231,25.908 107.442,25.908 Y4.NO@113.442,31.908
PRECHARGE_5V: MCU.2 TEST14.1 U11.3 | length 37.6
  Top Layer w0.254: U11.3@109.196,70.099 TEST14.1@112.399,70.099 113.884,70.099 116.586,67.397 116.586,64.516 117.602,63.5 129.032,63.5 130.937,65.405 130.937,67.818 132.715,69.596 132.715,70.954 133.307,71.546 133.786,71.546 135.434,73.195 MCU.2@135.434,73.879
PRECHARGE_12V: U11.18 X1.B12 | length 184.5
  Top Layer w0.254: U11.18@99.846,70.099 98.562,70.099 97.409,71.252 97.409,74.168 92.71,78.867 82.331,78.867 75.819,85.379 75.819,124.171 80.934,129.286 116.713,129.286 118.872,131.445 132.807,131.445 135.728,128.524 151.095,128.524 154.865,124.754 157.217,124.754 160.648,121.323 v1(162.052,121.323)
  Bottom Layer w0.254: X1.B12@160.743,101.691 162.097,103.045 162.097,121.278 v1(162.052,121.323)
RESET: C9.2 FLASH.10 MCU.63 | length 77.4
  Top Layer w0.254: FLASH.10@125.775,64.77 128.5,64.77 130.556,66.826 130.556,71.374 131.699,72.517 131.699,76.073 132.005,76.379 MCU.63@132.934,76.379 v1(136.144,76.379) ; C9.2@146.5,125.135 146.54,125.095 148.717,125.095 v1(149.86,123.952)
  Bottom Layer w0.254: v1(136.144,76.379) v1@136.346,76.379 ; v1@136.398,76.327 v1@136.346,76.379 ; v1(149.86,123.952) 149.86,121.285 143.765,115.19 143.765,94.997 136.144,87.376 136.144,76.581 v1@136.346,76.379
RTDS_5V: MCU.45 TEST16.1 U11.7 | length 35.3
  Top Layer w0.254: U11.7@109.196,75.179 110.363,75.179 111.252,76.068 TEST16.1@112.395,76.068 114.041,76.068 114.743,76.77 114.743,80.288 120.053,85.598 127.677,85.598 129.206,84.069 135.921,84.069 136.434,84.582 MCU.45@136.434,85.379
RTDS_12V: U11.14 X1.A32 | length 229.9
  Top Layer w0.254: U11.14@99.846,75.179 98.617,75.179 94.167,79.629 82.646,79.629 76.581,85.694 76.581,123.856 81.249,128.524 117.063,128.524 119.222,130.683 132.492,130.683 135.413,127.762 150.78,127.762 155.135,123.407 155.739,123.407 162.814,116.332 174.752,116.332 175.133,115.951 175.133,68.58 174.244,67.691 X1.A32@166.243,67.691
TS_LIVE_5V: MCU.50 R37.2 T4.1 TEST4.1
TS_LIVE_12V: R38.2 T4.3 X1.B9
TS_READY_5V: MCU.15 U9.13
TS_READY_12V: LATCH_RELAY.6 TEST7.1 U9.9 X1.A6 | length 59.3
  Top Layer w2.34: LATCH_RELAY.6@105.33,58.487 107.93,61.087 127.247,61.087 131.819,56.515 141.639,56.515 v2(144.687,59.563)
  Bottom Layer w2.34: v2(144.687,59.563) 151.611,59.563 156.739,64.691 X1.A6@158.243,64.691
TS_READY_SENSE_5V: MCU.54 U9.14
TS_READY_SENSE_12V: TEST6.1 U9.7 X1.B5
VCC_3V3: C11.2 FTDI.17 | length 3.7
  Top Layer w0.254: FTDI.17@139.706,113.469 v1(139.706,115.57)
  Bottom Layer w0.254: v1(139.706,115.57) 139.706,117.013 C11.2@139.787,117.094
pads on no net: FLASH.7 FLASH.9 FLASH.MH1 FLASH.MH2 FTDI.3 FTDI.6 FTDI.8 FTDI.9 FTDI.10 FTDI.11 FTDI.12 FTDI.13 FTDI.14 FTDI.24 FTDI.27 FTDI.28 J1.4 J1.6 J1.7 J1.8 J1.9 J1.10 J1.11 LATCH_RELAY.7 LDO.5 LDO.6 LDO.hole MC_PWR_SWITCH.3 MCU.4 MCU.13 MCU.16 MCU.17 MCU.18 MCU.19 MCU.20 MCU.21 MCU.22 MCU.23 MCU.25 MCU.33 MCU.35 MCU.53 MCU.55 MCU.56 MCU.57 MCU.60 T2.THM T3.THM T4.THM U3.3 U3.11 U8.3 U8.4 U8.5 U9.4 U9.8 U10.4 U10.8 U10.9 U10.13 U11.4 U11.8 U12.4 U12.8 U12.9 U12.13 X1.A7 X1.A8 X1.A12 X1.A20 X1.A21 X1.A27 X1.A31 X1.B6 X1.B7 X1.B10 X1.B15 X1.B16 X1.B17 X1.CH X1.LH X1.RH X2.1 Y1.NC Y2.NC Y3.NC Y4.NC Y5.NC

## Silkscreen, mask and mechanical layers (free items; w line width, h text height)
Top Overlay:
  lines w0.254: 126.238,84.582 126.238,98.679 129.159,101.6 132.461,101.6 ; 78.486,86.594 80.498,84.582 129.794,84.582 132.588,87.376 132.588,114.554 129.433,117.709 119.38,117.709 117.602,119.487 117.602,125.075 115.697,126.98 81.915,126.98 78.486,123.551 78.486,86.848 78.486,86.594
  text "BSPD" at 130.81,87.757 h3 r90

## Text inside footprints (layer, text, board x,y; h text height)
X1: Top Overlay "SUPER SEAL 60POS" at 154.709,45.997 h1.52 r90